# Altium PCB 新版关键回路分板.PcbDoc
Units mil, origin at the board's own origin, x right, y up, seen from the top; angles counter-clockwise.
Board outline 2415 x 1365 mil, 2 copper layers (Top Layer, Bottom Layer); 12 components, 6 nets, 25 pads, 0 vias.
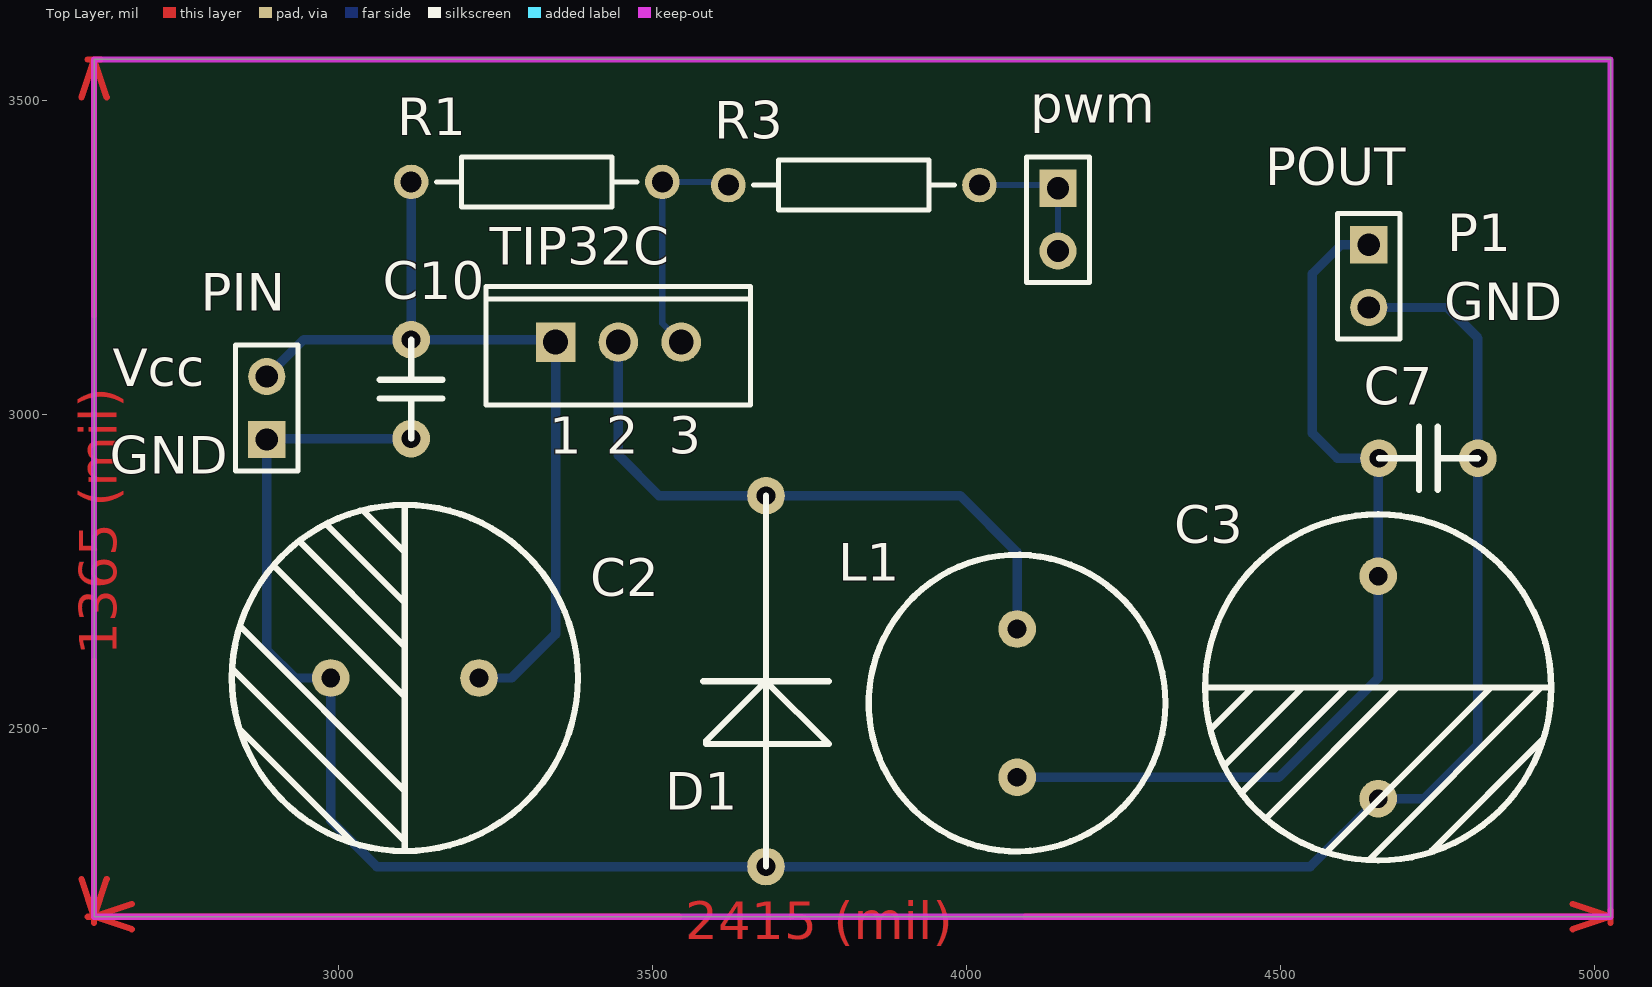
[diagram p0: Top Layer view]
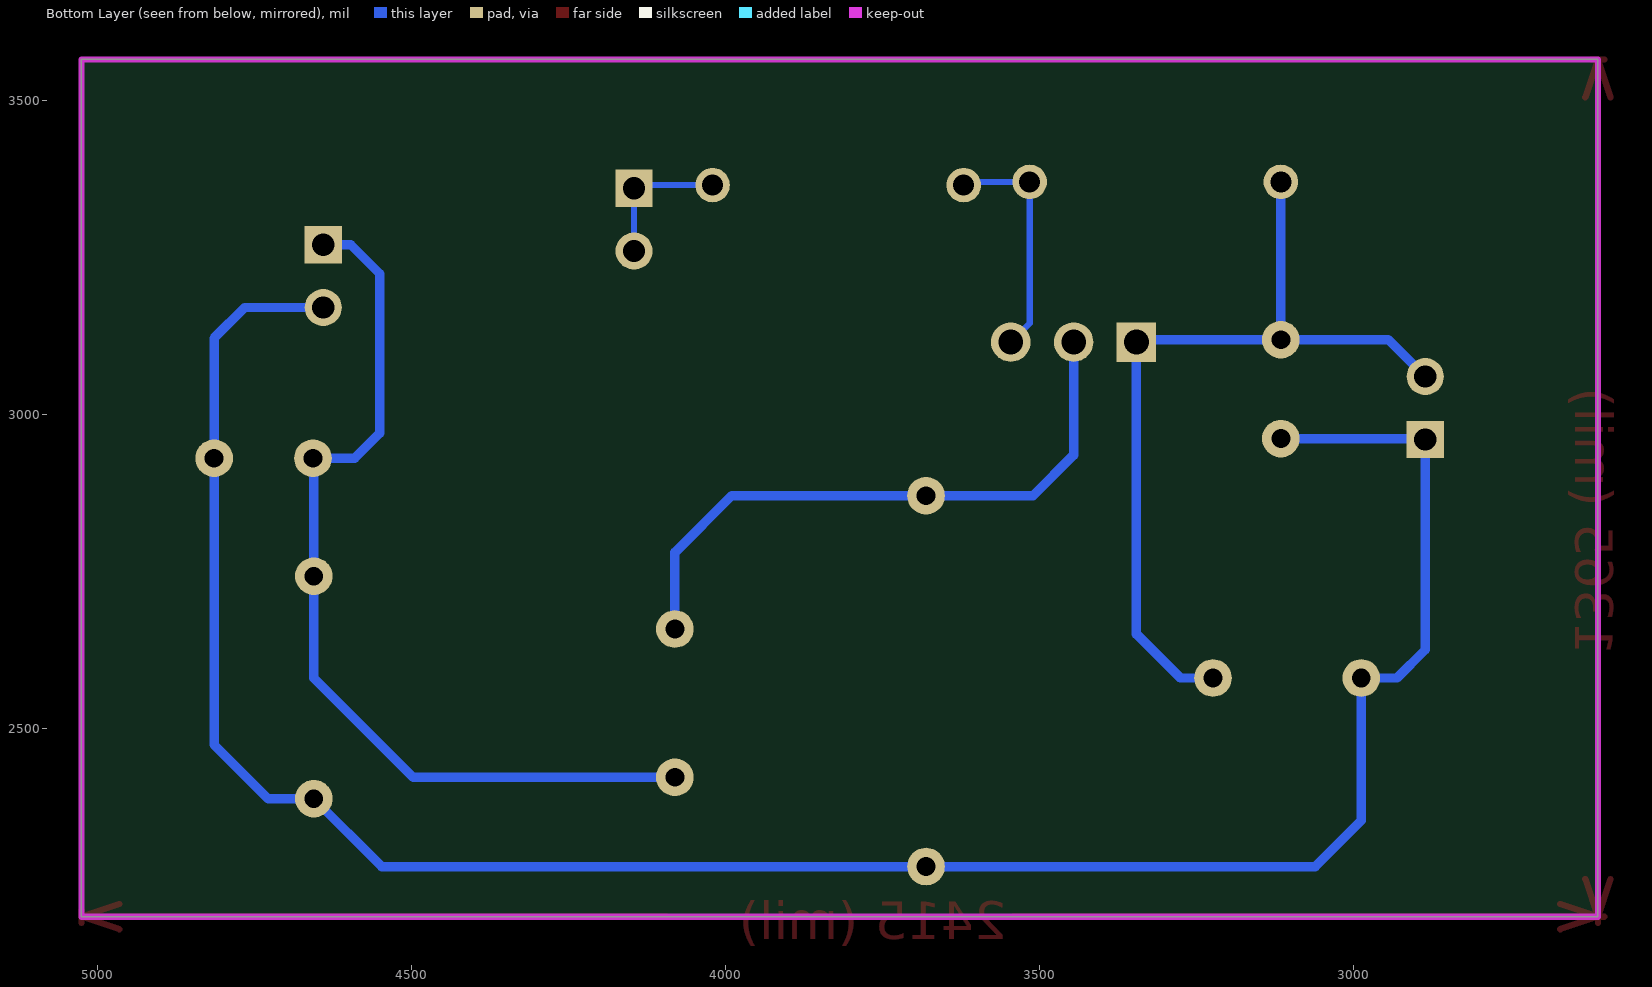
[diagram p1: Bottom Layer view, seen from below]

## Layer stack, top to bottom
Top Solder: solder mask 0.4, Solder Resist, Dk 3.5
Top Layer: signal copper 1.4
Dielectric 1: dielectric 12.6, FR-4, Dk 4.8
Bottom Layer: signal copper 1.4
Bottom Solder: solder mask 0.4, Solder Resist, Dk 3.5

## Board outline
2610,2200 2610,3565 5025,3565 5025,2200

## Design rules (kind name [scope] priority, off if disabled: settings)
Clearance [All] p1: gap=10
PolygonConnect [All] p1: connectstyle=Relief reliefconductorwidth=10 reliefentries=4 polygonreliefangle="90 Angle" airgapwidth=10
RoutingVias [All] p1: holewidth=28 width=50 viastyle="Through Hole" minholewidth=28 minwidth=50 maxholewidth=28 maxwidth=50
SolderMaskExpansion [All] p1: expansion=4
Width [All] p1: maxlimit=20 minlimit=10 preferedwidth=10 minimp=50.000000 maximp=50.000000 favimp=50.000000
30 further rules are at their usual default settings.

## Classes and differential pairs
component class 关键回路分图: C2 C3 C7 C10 D1 L1 PIN POUT R1 R3 TIP32C

## Components (designator, comment, footprint, x,y, rotation, side; value= is the part's Value field where it differs from the comment)
C2 "Cap Pol2" 3300电解电容 3105,2580 r270 top
C3 "Cap Pol2" 4700电解电容 4655,2565 r0 top
C7 "Cap" 瓷片电容 4735,2930 r90 top
C10 "Cap" 瓷片电容 3115,3040 r0 top
D1 "2A/40V" 肖特基 3680,2575 r180 top
L1 "Inductor" 电感实物 4080,2540 r0 top
PIN "Header 2" HDR1X2 2885,2960 r90 top (schematic designator P1)
POUT "Header 2" HDR1X2 4640,3270 r270 top (schematic designator P2)
pwm "Comment" HDR1X2 4145,3360 r270 top
R1 "Res2" AXIAL-0.4 3315,3370 r0 top
R3 "Res2" AXIAL-0.4 3820,3365 r180 top
TIP32C "Q1" TO-220-AB 3445,3115 r0 top

## Footprints (in the part's own frame and the unit in brackets; to place one, negate y for a bottom-side part, rotate by r counter-clockwise, add the part's x,y. Pads: shape width x height; smd on the part's side, far side on the other; paste and mask are expansions set on the pad)
3300电解电容 [mil]
  round 60 hole 30: 1(0,118.11) 2(0,-118.11)
  silkscreen extent -276,-276 276,276
4700电解电容 [mil]
  round 60 hole 30: 1(0,177.17) 2(0,-177.17)
  silkscreen extent -276,-276 276,276
AXIAL-0.4 [mm] "Axial Device, Thru-Hole; 2 Leads; 0.4 in Pin Spacing"
  round 1.4 hole 0.85: 1(-5.08,0) 2(5.08,0)
  silkscreen extent -4.06,-1.02 4.06,1.02
HDR1X2 [mm] "Connector; Header; 2 Position"
  rect 1.5x1.5 hole 0.9: 1(0,0)
  round 1.5 hole 0.9: 2(2.54,0)
  silkscreen extent -1.27,-1.27 3.81,1.27
TO-220-AB [mm] "TO, Thru-Hole, Vertical, Heatsink Mounted; 3 In-Line Leads; Pitch 2.54 mm"
  rect 1.6x1.6 hole 1: 1(-2.54,0)
  round 1.6 hole 1: 2(0,0) 3(2.54,0)
  silkscreen extent -5.35,-2.55 5.35,2.25
瓷片电容 [mil]
  round 60 hole 30: 1(0,-78.74) 2(0,78.74)
  silkscreen extent -50,-79 50,79
电感实物 [mil]
  round 60 hole 30: 1(0,118.11) 2(0,-118.11)
  silkscreen extent -236,-236 236,236
肖特基 [mil]
  round 60 hole 30: 1(0,-295.28) 2(0,295.28)
  silkscreen extent -100,-295 100,295

## Part data
C2 C3: "Polarized Capacitor (Axial)"
C7 C10: "Capacitor"
D1: library part Diode, "Default Diode"
PIN POUT: "Header, 2-Pin"
R1 R3: "Resistor"
TIP32C: library part PNP, "PNP Bipolar Transistor"

## Nets (pads, with @x,y where several pads share a name; then routed paths per layer and width w, separated by ;. In a path a pad name is that pad's centre, name@x,y a point inside that pad or via, vN(x,y) a via of type N, cw(c..) or ccw(c..) an arc to the next point about the centre after c; other vN are vias at no path point)
GND: C2.2 C3.2 C7.1 C10.1 D1.2 PIN.1 POUT.2 | length 3690.2
  Bottom Layer w15: PIN.1 2885,2625 2930,2580 C2.2 2986.89,2353.11 3060.28,2279.72 D1.2 4546.89,2279.72 C3.2 4727.83,2387.83 4813.74,2473.74 C7.1 4813.74,3121.26 4765,3170 POUT.2 ; PIN.1@2886.26,2961.26 C10.1
NetC2_1: C2.1 C10.2 PIN.2 R1.1 TIP32C.1 | length 1343
  Bottom Layer w15: PIN.2 2943.74,3118.74 C10.2 ; R1.1@3115,3360 C10.2 ; C2.1 3275,2580 3345,2650 TIP32C.1 3341.26,3118.74 C10.2
NetC3_1: C3.1 C7.2 L1.2 POUT.1 | length 1476.7
  Bottom Layer w15: L1.2 4496.89,2421.89 4655,2580 C3.1 4655,2928.74 C7.2 4590,2930 4550,2970 4550,3223.74 4596.26,3270 POUT.1
NetD1_2: D1.1 L1.1 TIP32C.2 | length 1001.1
  Bottom Layer w15: TIP32C.2 3445,2935 3509.72,2870.28 D1.1 3989.72,2870.28 4080,2780 L1.1
NetR1_2: R1.2 R3.2 TIP32C.3 | length 367.4
  Bottom Layer w10: TIP32C.3 3515,3145 R1.2 R3.2@3615,3370
NetR3_1: pwm.1 pwm.2 R3.1 | length 227.1
  Bottom Layer w10: R3.1 4140,3365 pwm.1 pwm.2
copper on no net: | length 3262.3
  Top Layer w10: 2590,2260 2610,2200 ; 2590,3505 2610,3565 ; 2600,2200 2620,2200 ; 2600,3565 2620,3565 ; 2610,2190 2610,2210 ; 2610,2606.58 2610,2200 ; 2610,3158.42 2610,3565 ; 2630,2260 2610,2200 ; 2630,3505 2610,3565 ; 2670,2180 2610,2200 ; 2670,2220 2610,2200 ; 3541.58,2200 2610,2200 ; 4093.42,2200 5025,2200 ; 4965,2180 5025,2200 ; 4965,2220 5025,2200 ; 5025,2190 5025,2210

## Keep-outs
Keep-Out Layer:
  the board outline again, w10

## Other copper
Top Layer:
  text "1365 (mil)" at 2645.99,2616.58 h60 r90
  text "2415 (mil)" at 3551.58,2164.01 h60

## Silkscreen, mask and mechanical layers (free items; w line width, h text height)
Top Overlay:
  text "P1" at 4765,3260 h60
  text "GND" at 4760,3150 h60
  text "Vcc" at 2640,3045 h60
  text "GND" at 2635,2905 h60

## Text inside footprints (layer, text, board x,y; h text height)
TIP32C: Top Overlay "3" at 3525.32,2936.85 h59.06; Top Overlay "2" at 3425.32,2936.85 h59.06; Top Overlay "1" at 3335.16,2936.85 h59.06